# Altium PCB Port Solar Panel.PcbDoc (part 2 of 2)
Units mm, origin at the board's own origin, x right, y up, seen from the top; angles counter-clockwise.
Board outline 327.5 x 87 mm, 2 copper layers (Top Layer, Bottom Layer), stack 1.58 mm thick; 63 components, 41 nets, 237 pads, 1893 vias.
Unrouted connection lines stored in the file: 33.
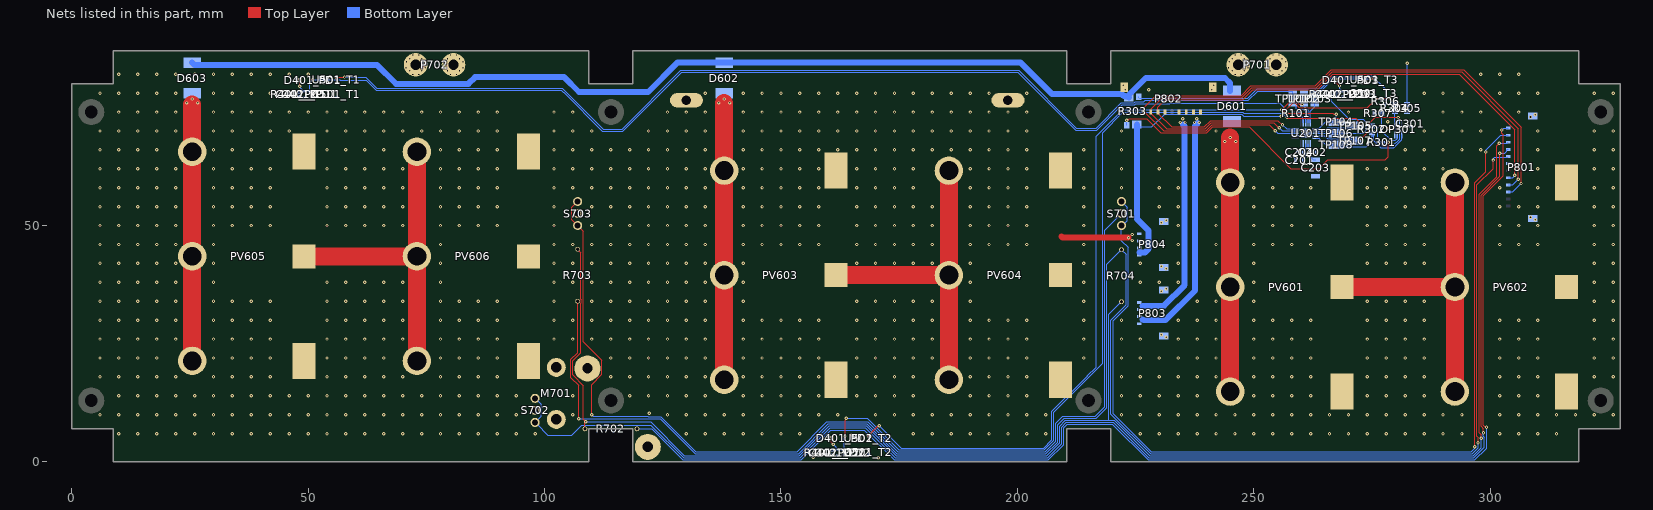
[diagram p2: the nets of this part, all layers, seen from the top]

## Via types
v1: diameter 0.711, hole 0.3, Top Layer to Bottom Layer, tented both sides, 1084 vias
v2: diameter 0.8, hole 0.5, Top Layer to Bottom Layer, 761 vias
v3: diameter 0.655, hole 0.25, Top Layer to Bottom Layer, 48 vias

## Nets (pads, with @x,y where several pads share a name; then routed paths per layer and width w, separated by ;. In a path a pad name is that pad's centre, name@x,y a point inside that pad or via, vN(x,y) a via of type N, cw(c..) or ccw(c..) an arc to the next point about the centre after c; other vN are vias at no path point) (continued)
GND: C201.1 C202.2 C203.2 C204.2 C301.1 C402_PD1.1 C402_PD2.1 C402_PD3.1 C501_T1.1 C501_T2.1 C501_T3.1 M701.1 OP301.4 P801.6 P801.M1 P801.M2 P802.6 P802.M1 P802.M2 P803.M1 P803.M2 P804.M1 P804.M2 pad.3 pad.5 R307.2 R401_PD1.1 R401_PD2.1 R401_PD3.1 S702.1 S703.1 U201.6 U201.9 U201.21 U501_T1.A1 U501_T2.A1 U501_T3.A1
  other v1: 170.6,0.905 156.8,0.962 164.9,5.8 10,6 14,6 18,6 22,6 26,6 30,6 34,6 38,6 42,6 46,6 50,6 54,6 58,6 62,6 66,6 70,6 74,6 78,6 82,6 86,6 90,6 94,6 98,6 130,6 134,6 138,6 142,6 146,6 150,6 154,6 178,6 182,6 186,6 190,6 194,6 198,6 202,6 206,6 226,6 230,6 234,6 238,6 242,6 246,6 250,6 254,6 258,6 262,6 266,6 270,6 274,6 278,6 282,6 286,6 290,6 294,6 302,6 306,6 310,6 314,6 6,10 10,10 14,10 18,10 22,10 26,10 30,10 34,10 38,10 42,10 46,10 50,10 54,10 58,10 62,10 66,10 70,10 74,10 78,10 82,10 86,10 90,10 94,10 106,10 126,10 130,10 134,10 138,10 142,10 146,10 150,10 154,10 158,10 162,10 170,10 174,10 178,10 182,10 186,10 190,10 194,10 198,10 202,10 206,10 222,10 226,10 230,10 234,10 238,10 242,10 246,10 250,10 254,10 258,10 262,10 266,10 270,10 274,10 278,10 282,10 286,10 290,10 294,10 302,10 306,10 310,10 314,10 318,10 322,10 326,10 122.152,10.281 10,14 14,14 18,14 22,14 26,14 30,14 34,14 38,14 42,14 46,14 50,14 54,14 58,14 62,14 66,14 70,14 74,14 78,14 82,14 86,14 90,14 94,14 106,14 118,14 122,14 126,14 130,14 134,14 142,14 146,14 150,14 154,14 158,14 166,14 170,14 174,14 178,14 190,14 194,14 198,14 202,14 222,14 226,14 230,14 234,14 238,14 250,14 254,14 258,14 262,14 274,14 278,14 282,14 286,14 302,14 306,14 310,14 6,18 10,18 14,18 18,18 22,18 30,18 34,18 38,18 42,18 54,18 58,18 62,18 66,18 70,18 78,18 82,18 86,18 90,18 114,18 118,18 122,18 126,18 130,18 134,18 142,18 146,18 150,18 154,18 158,18 166,18 170,18 174,18 178,18 190,18 194,18 198,18 202,18 222,18 226,18 230,18 234,18 238,18 242,18 250,18 254,18 258,18 262,18 274,18 278,18 282,18 286,18 302,18 306,18 310,18 322,18 326,18 6,22 10,22 14,22 18,22 30,22 34,22 38,22 42,22 54,22 58,22 62,22 66,22 78,22 82,22 86,22 90,22 114,22 118,22 122,22 126,22 130,22 134,22 142,22 146,22 150,22 154,22 158,22 166,22 170,22 174,22 178,22 182,22 190,22 194,22 198,22 202,22 214,22 222,22 226,22 230,22 234,22 238,22 242,22 250,22 254,22 258,22 262,22 274,22 278,22 282,22 286,22 302,22 306,22 310,22 322,22 326,22 6,26 10,26 14,26 18,26 22,26 30,26 34,26 38,26 42,26 54,26 58,26 62,26 66,26 70,26 78,26 82,26 86,26 90,26 102,26 106,26 110,26 114,26 118,26 122,26 126,26 130,26 134,26 142,26 146,26 150,26 154,26 158,26 166,26 170,26 174,26 178,26 182,26 190,26 194,26 198,26 202,26 214,26 222,26 226,26 234,26 238,26 242,26 250,26 254,26 258,26 262,26 274,26 278,26 282,26 286,26 302,26 306,26 310,26 322,26 326,26 6,30 10,30 14,30 18,30 22,30 30,30 34,30 38,30 42,30 54,30 58,30 62,30 66,30 70,30 78,30 82,30 86,30 90,30 102,30 106,30 110,30 114,30 118,30 122,30 126,30 130,30 134,30 142,30 146,30 150,30 154,30 158,30 166,30 170,30 174,30 178,30 182,30 190,30 194,30 198,30 202,30 214,30 222,30 234,30 238,30 242,30 250,30 254,30 258,30 262,30 274,30 278,30 282,30 286,30 302,30 306,30 310,30 322,30 326,30 6,34 10,34 14,34 18,34 22,34 30,34 34,34 38,34 42,34 54,34 58,34 62,34 66,34 70,34 78,34 82,34 86,34 90,34 102,34 110,34 114,34 118,34 122,34 126,34 130,34 134,34 142,34 166,34 170,34 174,34 178,34 182,34 190,34 214,34 238,34 242,34 250,34 274,34 278,34 282,34 286,34 322,34 326,34 6,38 10,38 14,38 18,38 22,38 30,38 54,38 58,38 62,38 66,38 70,38 78,38 102,38 106,38 110,38 114,38 118,38 122,38 126,38 130,38 134,38 142,38 190,38 214,38 226,38 230,38 234,38 250,38 322,38 326,38 6,42 10,42 14,42 18,42 22,42 30,42 78,42 102,42 106,42 110,42 114,42 118,42 122,42 126,42 130,42 134,42 142,42 166,42 170,42 174,42 178,42 182,42 190,42 214,42 226,42 234,42 242,42 250,42 274,42 278,42 282,42 286,42 322,42 326,42 6,46 10,46 14,46 18,46 22,46 30,46 78,46 102,46 106,46 110,46 114,46 118,46 122,46 126,46 130,46 134,46 142,46 146,46 150,46 154,46 158,46 166,46 170,46 174,46 178,46 182,46 190,46 194,46 198,46 202,46 214,46 230,46 234,46 242,46 250,46 254,46 258,46 262,46 274,46 278,46 282,46 286,46 302,46 306,46 310,46 322,46 326,46 6,50 10,50 14,50 18,50 22,50 30,50 34,50 38,50 42,50 54,50 58,50 62,50 66,50 70,50 78,50 82,50 86,50 90,50 102,50 110,50 114,50 118,50 122,50 126,50 130,50 134,50 142,50 146,50 150,50 154,50 158,50 166,50 170,50 174,50 178,50 182,50 190,50 194,50 198,50 202,50 214,50 234,50 242,50 250,50 254,50 258,50 262,50 274,50 278,50 282,50 286,50 302,50 306,50 310,50 322,50 326,50 6,54 10,54 14,54 18,54 22,54 30,54 34,54 38,54 42,54 54,54 58,54 62,54 66,54 70,54 78,54 82,54 86,54 90,54 102,54 110,54 114,54 118,54 122,54 126,54 130,54 134,54 142,54 146,54 150,54 154,54 158,54 166,54 170,54 174,54 178,54 182,54 190,54 194,54 198,54 202,54 214,54 230,54 234,54 242,54 250,54 254,54 258,54 262,54 274,54 278,54 282,54 286,54 302,54 306,54 310,54 322,54 326,54 6,58 10,58 14,58 18,58 22,58 30,58 34,58 38,58 42,58 54,58 58,58 62,58 66,58 70,58 78,58 82,58 86,58 90,58 102,58 106,58 110,58 114,58 118,58 122,58 126,58 130,58 134,58 142,58 146,58 150,58 154,58 158,58 166,58 170,58 174,58 178,58 190,58 194,58 198,58 202,58 214,58 222,58 230,58 234,58 250,58 254,58 258,58 262,58 274,58 278,58 282,58 286,58 302,58 310,58 322,58 326,58 6,62 10,62 14,62 18,62 22,62 30,62 34,62 38,62 42,62 54,62 58,62 62,62 66,62 70,62 78,62 82,62 86,62 90,62 102,62 106,62 110,62 114,62 118,62 122,62 126,62 130,62 134,62 142,62 146,62 150,62 154,62 158,62 166,62 170,62 174,62 178,62 190,62 194,62 198,62 202,62 214,62 222,62 230,62 234,62 242,62 250,62 254,62 274,62 278,62 282,62 286,62 290,62 310,62 322,62 326,62 6,66 10,66 14,66 18,66 30,66 34,66 38,66 42,66 54,66 58,66 62,66 66,66 78,66 82,66 86,66 90,66 102,66 106,66 110,66 114,66 118,66 122,66 126,66 130,66 134,66 142,66 146,66 150,66 154,66 158,66 162,66 166,66 170,66 174,66 178,66 182,66 186,66 190,66 194,66 198,66 202,66 214,66 222,66 230,66 234,66 242,66 250,66 282,66 286,66 290,66 294,66 298,66 310,66 322,66 326,66 260.4,68.95 261.5,68.95 6,70 10,70 14,70 18,70 22,70 30,70 34,70 38,70 42,70 46,70 54,70 58,70 62,70 66,70 70,70 74,70 78,70 82,70 86,70 90,70 102,70 106,70 110,70 122,70 126,70 130,70 134,70 142,70 146,70 150,70 154,70 158,70 162,70 166,70 170,70 174,70 178,70 182,70 186,70 190,70 194,70 198,70 202,70 222,70 242,70 286,70 290,70 294,70 298,70 310,70 322,70 326,70 260.4,70.05 261.5,70.05 278.327,70.435 278.338,71.95 10,74 14,74 18,74 22,74 30,74 34,74 38,74 42,74 46,74 50,74 54,74 58,74 62,74 66,74 70,74 74,74 78,74 82,74 86,74 90,74 102,74 106,74 126,74 130,74 134,74 142,74 146,74 150,74 154,74 158,74 162,74 166,74 170,74 174,74 178,74 182,74 186,74 190,74 194,74 198,74 202,74 270,74 274,74 290,74 294,74 298,74 306,74 6,78 10,78 14,78 18,78 22,78 30,78 34,78 38,78 42,78 46,78 134,78 142,78 146,78 150,78 154,78 158,78 162,78 166,78 170,78 174,78 178,78 182,78 186,78 190,78 194,78 202,78 286,78 290,78 294,78 302,78 306,78 310,78 322,78 326,78 227.775,78.686 10,82 14,82 18,82 22,82 26,82 30,82 34,82 38,82 42,82 46,82 50,82 298,82 302,82 306,82
NetC201_2: C201.2 U201.8 | length 3.6
  Bottom Layer w0.254: C201.2@260.5,63.85 260.5,64.05 260.95,64.5 U201.8@260.95,67.3
NetC202_1: C202.1 C203.1 U201.7 | length 4.3
  Bottom Layer w0.254: U201.7@261.45,67.3 261.45,66.05 261.9,65.6 C202.1@261.9,65.5 261.9,64.625 262.575,63.95 C203.1@263.05,63.95
NetD601_1: D601.1 PV601.1 | length 53.7
  Top Layer w3.81: PV601.1@245,14.889 PV601.1@245,59.111 v1(245,68.613)
  other v1: 243.837,67.774 246.15,67.774
NetD602_1: D602.1 PV603.1 | length 58.5
  Top Layer w3.81: PV603.1@138,17.389 PV603.1@138,61.611 138,75.924
  other v1: 136.837,75.924 139.15,75.924 138,76.763
NetD603_1: D603.1 PV605.1 | length 54.2
  Top Layer w3.81: PV605.1@25.5,21.389 PV605.1@25.5,43.5 PV605.1@25.5,65.611 25.5,75.6
  other v1: 24.337,75.924 26.65,75.924 25.5,76.763
NetOP301_2: OP301.2 R301.2 R302.1 | length 10.7
  Bottom Layer w0.254: R302.1@274.973,71.075 275.073,70.975 275.83,70.975 276.155,70.65 276.155,68.095 276.503,67.747 276.503,67.723 276.626,67.6 R301.2@276.65,67.6 276.674,67.6 276.797,67.477 276.797,67.249 277.196,66.85 279.387,66.85 280.798,68.261 280.798,69.153 OP301.2@280.8,69.155
NetOP301_3: OP301.3 R306.2 R307.1 | length 11.2
  Bottom Layer w0.254: R306.2@277.9,75.873 277.9,75.323 277.184,74.607 277.184,73.848 R307.1@277.087,73.75 277.087,69.988 279.075,68 279.926,68 280.3,68.374 OP301.3@280.3,69.155
NetOP301_5: OP301.5 R304.2 R305.2 | length 2.5
  Bottom Layer w0.254: OP301.5@279.8,71.645 R304.2@279.8,74.1
NetPV601_2: PV601.2 PV602.1 | length 68.1
  Top Layer w3.81: PV601.2@268.622,37 PV602.1@292.5,37 ; PV602.1@292.5,14.889 PV602.1@292.5,37 ; PV602.1@292.5,59.111 PV602.1@292.5,37
NetPV603_2: PV603.2 PV604.1 | length 68.1
  Top Layer w3.81: PV603.2@161.622,39.5 PV604.1@185.5,39.5 ; PV604.1@185.5,17.389 PV604.1@185.5,39.5 ; PV604.1@185.5,61.611 PV604.1@185.5,39.5
NetPV605_2: PV605.2 PV606.1 | length 68.1
  Top Layer w3.81: PV605.2@49.122,43.5 PV606.1@73,43.5 ; PV606.1@73,21.389 PV606.1@73,43.5 ; PV606.1@73,65.611 PV606.1@73,43.5
NetR101_1: R101.1 U201.17 | length 2.2
  Bottom Layer w0.254: R101.1@259.667,73.6 259.667,73.475 259.94,73.202 260.45,72.692 U201.17@260.45,71.7
NetR301_1: R301.1 R303.3 | length 67
  Top Layer w0.203: v1(223.1,72.25) 223.3,72.25 223.6,72.55 227.35,72.55 230.275,69.625 240.071,69.625 241.341,70.895 249.005,70.895 257.85,62.05 263.8,62.05 265.65,63.9 277.75,63.9 278.4,64.55 v1(278.4,67.6)
  Bottom Layer w0.203: v1(223.1,72.25) 223.1,71.231 R303.3@223.13,71.201 ; R301.1@277.402,67.6 v1(278.4,67.6)
NetR303_4: R303.4 R306.1 | length 57.8
  Bottom Layer w0.254: R303.4@225.67,77.199 225.67,77.074 225.844,76.9 248.675,76.9 250.738,78.963 264.102,78.963 266.621,81.482 274.032,81.482 274.26,81.71 274.973,81.71 277.9,78.783 R306.1@277.9,76.625
NetS701_1: S701.1 S703.2 S703.3 | length 214.7
  Top Layer w0.254: S703.2@107,55.08 105.743,53.823 105.743,51.257 S703.3@107,50 108.237,48.763 108.237,25.463 112.144,21.556 112.144,18.535 109.95,16.341 v1(109.95,10)
  Bottom Layer w0.254: v1(109.95,10) 110.027,10 110.327,9.7 121.838,9.7 121.946,9.592 124.626,9.592 132.018,2.2 153.4,2.2 159.7,8.5 168.361,8.5 174.702,2.159 205.841,2.159 208.087,4.406 208.087,8.222 209.548,9.683 216.483,9.683 218.45,11.65 218.45,48.99 S701.1@222,52.54
NetU201_12: U201.12
PortKnifeReturn: P801.5 R703.1 R704.1 | length 371.2
  Top Layer w0.254: R703.1@107,34 107,23.109 105.568,21.678 105.568,17.865 107.201,16.233 107.201,9.199 v1(107.25,9.15) ; v1(297.4,4.1) 297.4,5.25 297.182,5.468 297.182,58.582 300.65,62.05 v1(300.65,63.85)
  Bottom Layer w0.254: v1(107.25,9.15) 107.26,9.16 124.447,9.16 131.839,1.768 153.736,1.768 160.036,8.068 168.182,8.068 174.523,1.727 206.02,1.727 208.519,4.227 208.519,7.917 209.854,9.251 216.662,9.251 218.9,11.489 218.9,41.8 R704.1@222,44.9 222.968,43.932 222.968,33.2 219.768,30 219.768,10.114 228.155,1.727 296.161,1.727 297.4,2.966 v1(297.4,4.1) ; v1(300.65,63.85) 300.65,64.15 300.985,64.485 303.685,64.485 P801.5@303.8,64.6
SPI_CLK: P801.8 P802.7 U201.15 | length 127.2
  Top Layer w0.254: v1(256.05,71.35) 255.95,71.35 255.1,72.2 240.85,72.2 239.545,70.895 232.605,70.895 229.7,73.8 P802.7@229.7,74 229.7,74.994 231.305,76.598 247.64,76.598 248.071,77.03 248.08,77.03 249.736,78.686 263.389,78.686 266.658,81.955 274.251,81.955 274.27,81.974 293.476,81.974 305.2,70.25 v1(305.2,60.6)
  Bottom Layer w0.254: v1(256.05,71.35) 256.9,70.5 U201.15@258.75,70.5 ; P801.8@303.8,60.1 304.7,60.1 v1(305.2,60.6)
SPI_MISO: P801.9 P802.8 U201.14 | length 133.2
  Top Layer w0.254: v1(255.335,70.65) 255.293,70.65 254.204,71.739 241,71.739 239.724,70.463 231.537,70.463 228.2,73.8 P802.8@228.2,74 228.327,74.127 228.327,74.703 230.654,77.03 247.461,77.03 249.549,79.118 263.21,79.118 266.582,82.49 293.91,82.49 305.9,70.5 v1(305.9,59.8)
  Bottom Layer w0.254: v1(255.335,70.65) 255.985,70 U201.14@258.75,70 ; P801.9@303.8,58.6 304.7,58.6 v1(305.9,59.8)
SPI_MOSI: P801.10 P802.9 U201.13 | length 139.4
  Top Layer w0.254: v1(254.5,70.05) 253.242,71.308 241.179,71.308 239.903,70.032 230.918,70.032 226.95,74 P802.9@226.7,74 226.7,74.876 229.286,77.462 247.282,77.462 249.37,79.55 263.032,79.55 266.403,82.922 294.43,82.922 306.56,70.791 306.56,58.96 v1(306.5,58.9)
  Bottom Layer w0.254: v1(254.5,70.05) 255.05,69.5 U201.13@258.75,69.5 ; P801.10@303.8,57.1 304.7,57.1 v1(306.5,58.9)
SwitchDeployable_P: P801.2 S701.2 S701.3 | length 198.1
  Top Layer w0.254: v1(296.7,3.2) 296.705,3.205 296.705,4.297 296.74,4.332 296.74,4.374 296.75,4.384 296.75,59.1 299.05,61.4 v1(299.05,65.55)
  Bottom Layer w0.254: S701.2@222,55.08 223.257,53.823 223.257,51.007 222.25,50 S701.3@222,50 222,46.819 223.4,45.419 223.4,33.021 220.25,29.871 220.25,10.243 228.334,2.159 295.959,2.159 296.7,2.9 v1(296.7,3.2) ; v1(299.05,65.55) 299.05,65.95 302.2,69.1 P801.2@303.8,69.1
SwitchUHF_P: P801.4 S702.2 S702.3 | length 292.5
  Top Layer w0.254: v1(298.55,6.2) 298.55,7.066 298.045,7.571 298.045,56.438 302,60.393 v1(302,65.3)
  Bottom Layer w0.254: S702.2@98,8.05 98.325,8.05 100.675,5.7 105.742,5.7 107.847,7.805 122.509,7.805 129.409,0.905 154.094,0.905 160.389,7.2 167.829,7.2 174.165,0.864 206.377,0.864 209.383,3.869 209.383,7.393 210.377,8.388 220.273,8.388 227.797,0.864 296.519,0.864 298.76,3.105 298.76,5.274 298.55,5.484 v1(298.55,6.2) ; S702.2@98,8.375 99.268,9.643 99.268,12.232 98.045,13.455 S702.3@98,13.455 ; v1(302,65.3) 303,65.3 303.427,65.727 303.427,65.927 303.6,66.1 P801.4@303.8,66.1 P801.4@303.805,66.105
UHFKnifeReturn_P: P801.1 R702.1 | length 268.2
  Top Layer w0.254: v1(299.2,7.35) 299.113,7.437 298.863,7.437 298.477,7.823 298.477,56.259 302.737,60.519 302.737,69.223 302.427,69.533 302.427,70.027 302.6,70.2 v1(302.45,70.2)
  Bottom Layer w0.254: R702.1@119.55,7 122.664,7 129.191,0.473 154.273,0.473 160.5,6.7 167.65,6.7 173.918,0.432 206.556,0.432 209.815,3.69 209.815,7.215 210.556,7.956 220.094,7.956 227.618,0.432 296.698,0.432 299.21,2.944 299.21,6.474 299.2,6.484 v1(299.2,7.35) ; v1(302.45,70.2) 302.818,70.568 303.768,70.568 P801.1@303.8,70.6
V+: D601.2 D602.2 D603.2 R303.1 | length 232.6
  Bottom Layer w1.27: D603.2@25.5,84.45 25.95,84 64.55,84 68.6,79.95 83.9,79.95 85.35,81.4 104.15,81.4 107.3,78.25 121.9,78.25 128.1,84.45 D602.2@138,84.45 200.7,84.45 207.35,77.8 222.093,77.8 222.361,77.532 222.451,77.532 222.738,77.245 223.375,77.245 R303.1@223.565,77.055 ; R303.1@223.482,77.532 227.15,81.2 243.9,81.2 245,80.1 D601.2@245,78.5
V-: P701.1 P702.1 P804.1 P804.2 PV602.2 PV604.2 PV606.2 R305.1 | length 23.1
  Top Layer w1.27: 209.3,47.7 209.55,47.45 v1(223.5,47.45)
  Bottom Layer w0.254: R305.1@282.4,75.6 282.5,75.7 282.45,75.75 v1(282.45,84.3)
  other v1: 224.3,46.85 224.3,48.1
  other v3: 72.115,81.968 73.385,81.968 80.115,81.968 81.385,81.968 246.065,81.968 247.335,81.968 254.065,81.968 255.335,81.968 71.48,82.73 74.02,82.73 79.48,82.73 82.02,82.73 245.43,82.73 247.97,82.73 253.43,82.73 255.97,82.73 70.718,83.365 74.782,83.365 78.718,83.365 82.782,83.365 244.668,83.365 248.732,83.365 252.668,83.365 256.732,83.365 70.845,84.635 74.782,84.635 78.845,84.635 82.782,84.635 244.795,84.635 248.732,84.635 252.795,84.635 256.732,84.635 71.48,85.27 74.02,85.27 79.48,85.27 82.02,85.27 245.43,85.27 247.97,85.27 253.43,85.27 255.97,85.27 72.115,86.032 73.385,86.032 80.115,86.032 81.385,86.032 246.065,86.032 247.335,86.032 254.065,86.032 255.335,86.032
V_out: P804.3 P804.4 R303.2 R304.1 | length 89
  Top Layer w0.254: v1(255.75,73.1) 256.34,73.69 256.34,74.024 258.288,75.972 258.603,75.972 259.632,74.944 273.944,74.944 275.95,76.95 v1(278.75,76.95)
  Bottom Layer w0.254: R303.2@225.235,71.345 225.68,70.9 228.45,70.9 231.105,73.555 247.425,73.555 247.88,73.1 v1(255.75,73.1) ; v1(278.75,76.95) 278.837,76.863 278.837,76.438 279.675,75.6 R304.1@279.8,75.6
  Bottom Layer w1.27: R303.2@225.235,71.345 225.235,51.415 227.75,48.9 227.75,45.1 227,44.35 225.85,44.35
VIN0: TP101.1 U201.18 U501_T1.B1 | length 229.4
  Top Layer w0.203: U501_T1.B1@55.8,81 U501_T1.B1@55.8,81 55.801,81.145 56.056,81.4 v1(57.7,81.4)
  Bottom Layer w0.203: v1(57.7,81.4) 62.225,81.4 64.565,79.06 64.625,79 103.716,79 103.8,79 112.4,70.4 116.4,70.4 128.838,82.838 200.237,82.838 212.475,70.6 216.645,70.6 221.996,75.951 224.686,75.951 224.873,76.138 226.713,76.138 227.025,76.45 248.8,76.45 250.794,78.444 258.206,78.444 258.25,78.4 TP101.1@258.25,76.65
  Bottom Layer w0.254: TP101.1@258.25,76.65 259.012,75.888 259.012,74.738 259.119,74.631 260.469,74.631 260.95,74.15 U201.18@260.95,71.7
VIN1: TP102.1 U201.19 U501_T2.B1 | length 163.1
  Top Layer w0.203: U501_T2.B1@168.3,5.25 U501_T2.B1@168.3,5.25 168.301,5.395 170.459,7.553 170.653,7.553 v1(170.75,7.65) ; v1(255.85,74.5) 256.9,75.55 257.729,76.379 258.802,76.379 259.577,75.604 v1(260.225,75.604)
  Bottom Layer w0.203: v1(170.75,7.65) 175.454,2.946 205.515,2.946 207.3,4.732 207.3,10.744 214.825,18.269 ; 214.8,18.2 216.645,20.045 216.645,68.84 222.283,74.477 255.827,74.477 v1(255.85,74.5)
  Bottom Layer w0.254: TP102.1@260.6,76.65 260.6,75.2 261.45,74.35 U201.19@261.45,71.7
VIN2: TP103.1 U201.20 U501_T3.B1 | length 19.9
  Top Layer w0.203: v1(274.699,81.05) 275.25,81.05 U501_T3.B1@275.3,81
  Bottom Layer w0.254: U201.20@261.95,71.7 261.95,74.148 262.9,75.098 262.9,76.65 262.9,77.15 266.8,81.05 v1(274.699,81.05)
VIN3: C401_PD1.1 C402_PD1.2 D401_PD1.1 R401_PD1.2 TP104.1 U201.1 | length 249.4
  Top Layer w0.254: D401_PD1.1@48,80.75 48.212,80.538 v1(48.212,79.45) ; v1(257,73.75) 266.7,73.75 266.9,73.55 v1(267.4,73.55)
  Bottom Layer w0.254: R401_PD1.2@48.05,78.126 48.162,78.238 49.088,78.238 C402_PD1.2@49.2,78.35 ; v1(48.212,79.45) 48.3,79.363 48.3,79.15 49.1,78.35 C402_PD1.2@49.2,78.35 ; v1(257,73.75) 257,74.284 255.424,75.86 232.326,75.86 232.198,75.732 225.042,75.732 224.854,75.544 222.164,75.544 216.814,70.194 212.306,70.194 200.068,82.432 129.007,82.432 116.568,69.994 112.232,69.994 104.044,78.181 103.96,78.181 103.548,78.594 64.456,78.594 62.31,80.74 56.783,80.74 56.652,80.87 v1(51.001,80.87) 50.35,80.219 C401_PD1.1@50.35,78.35 C402_PD1.2@49.2,78.35 ; U201.1@263.15,70.5 263.771,70.5 265.171,71.9 TP104.1@267.45,71.9 267.4,71.95 v1(267.4,73.55)
VIN4: C401_PD2.1 C402_PD2.2 D401_PD2.1 R401_PD2.2 TP105.1 U201.2 | length 195.1
  Top Layer w0.203: v1(163.55,5.45) 163.55,8.863 163.8,9.113 v1(163.8,9.25) ; v1(257,72.85) 257.135,72.715 271.585,72.715 v1(272.7,71.6)
  Top Layer w0.254: D401_PD2.1@160.5,5 160.583,4.917 160.583,4.217 v1(161.05,3.75)
  Bottom Layer w0.203: C401_PD2.1@163.1,2.6 163.2,2.6 163.358,2.758 163.358,5.121 163.55,5.313 v1(163.55,5.45) ; v1(163.8,9.25) 168.2,9.25 174.885,2.565 205.673,2.565 207.681,4.574 207.681,10.538 207.741,10.597 218,20.857 218,69.656 222.305,73.961 247.596,73.961 247.807,73.75 256.1,73.75 v1(257,72.85) ; U201.2@263.15,70 264.951,70 265.62,70.668 271.382,70.668 TP105.1@271.4,70.65
  Bottom Layer w0.254: R401_PD2.2@160.8,2.376 160.912,2.488 161.738,2.488 161.85,2.6 161.692,2.758 161.692,3.108 v1(161.05,3.75) ; C402_PD2.2@161.95,2.6 C401_PD2.1@163.1,2.6
VIN5: C401_PD3.1 C402_PD3.2 D401_PD3.1 R401_PD3.2 TP106.1 U201.3 | length 29.9
  Top Layer w0.254: D401_PD3.1@267.5,80.75 267.633,80.617 267.633,80.017 v1(268.1,79.55)
  Bottom Layer w0.254: U201.3@263.15,69.5 TP106.1@267.45,69.5 273.1,69.5 273.8,70.2 273.8,71.835 273.135,72.5 270.149,72.5 266.4,76.249 266.4,77.5 267.076,78.176 R401_PD3.2@267.6,78.176 267.712,78.288 268.638,78.288 C402_PD3.2@268.75,78.4 ; v1(268.1,79.55) 268.187,79.463 268.187,78.963 268.517,78.633 268.517,78.533 268.65,78.4 C402_PD3.2@268.75,78.4 ; C401_PD3.1@269.9,78.4 C402_PD3.2@268.75,78.4
VIN6: OP301.6 OP301.7 TP107.1 U201.4 | length 19.1
  Top Layer w0.254: v1(272.7,68.35) 274.3,69.95 274.3,71.5 275.65,72.85 v1(280.55,72.85)
  Bottom Layer w0.254: U201.4@263.15,69 264.915,69 265.609,68.306 271.344,68.306 TP107.1@271.35,68.3
VIN7: OP301.1 R302.2 TP108.1 U201.5 | length 24.3
  Bottom Layer w0.254: U201.5@263.15,68.5 263.771,68.5 265.171,67.1 TP108.1@267.45,67.1 267.844,66.706 273.788,66.706 274.35,67.268 274.35,68.225 275.3,69.175 275.3,67.924 276.806,66.418 279.566,66.418 281.298,68.151 281.298,69.153 OP301.1@281.3,69.155 ; R302.2@275.3,69.5 R302.2@275.3,69.725
VKnife: P801.3 R702.2 R703.2 R704.2 | length 341.4
  Top Layer w0.254: R703.2@107,45 107,44.892 107.692,44.199 107.692,34.446 107.805,34.333 107.805,33.667 107.692,33.554 107.692,23.053 106,21.36 106,18.4 108.237,16.163 108.237,9.013 108.638,8.611 v1(108.75,8.5) ; R702.2@108.55,7 108.55,8.417 v1@108.633,8.5 ; v1(298.1,5) 298.1,5.716 297.614,6.202 297.614,56.617 301.36,60.364 301.36,64.674 301.34,64.694 301.34,66.89 v1(301.85,67.4)
  Bottom Layer w0.254: v1(108.75,8.5) 122.425,8.5 129.588,1.336 153.915,1.336 160.215,7.636 167.797,7.636 167.802,7.632 168.008,7.632 174.344,1.295 206.199,1.295 208.951,4.048 208.951,7.611 210.159,8.82 219.332,8.82 ; R704.2@222,33.9 219.332,31.232 219.332,8.82 ; v1(298.1,5) 298.1,3.055 296.34,1.295 227.976,1.295 220.452,8.82 219.332,8.82 ; v1(301.85,67.4) 303.278,67.4 303.305,67.427 303.627,67.427 P801.3@303.8,67.6
VPortD+: P802.1 P802.2 P803.3 P803.4 | length 49.3
  Bottom Layer w1.27: 226.5,30.15 226.65,30 231.3,30 237.55,36.25 237.55,71.1 238.1,71.65
  other v1: 237.45,71.8 238.45,71.8 237.95,72.6
VPortD-: P802.3 P802.4 P803.1 P803.2 | length 44.8
  Bottom Layer w1.27: 226.5,32.95 226.55,33 230.95,33 235.35,37.4 235.35,71 235,71.35
  other v1: 234.4,71.8 235.45,71.8 234.95,72.6
pads on no net: OP301.9
copper on no net:
  other v2: 232,4 236,4 240,4 244,4 248,4 252,4 256,4 260,4 264,4 280,4 284,4 288,4 292,4 300,4 304,4 308,4 128,8 132,8 136,8 140,8 144,8 148,8 152,8 228,8 232,8 236,8 240,8 244,8 248,8 252,8 256,8 260,8 264,8 276,8 280,8 284,8 288,8 292,8 296,8 304,8 308,8 312,8 12,12 16,12 20,12 24,12 28,12 32,12 36,12 40,12 44,12 60,12 64,12 68,12 72,12 76,12 80,12 84,12 88,12 92,12 124,12 128,12 132,12 136,12 140,12 144,12 148,12 152,12 156,12 172,12 176,12 180,12 184,12 188,12 192,12 196,12 200,12 204,12 228,12 232,12 236,12 240,12 248,12 252,12 256,12 260,12 264,12 272,12 276,12 280,12 284,12 288,12 296,12 300,12 304,12 308,12 312,12 8,16 12,16 16,16 20,16 24,16 28,16 32,16 36,16 40,16 44,16 56,16 60,16 64,16 68,16 72,16 76,16 80,16 84,16 88,16 92,16 120,16 124,16 128,16 132,16 144,16 148,16 152,16 156,16 168,16 172,16 176,16 180,16 192,16 196,16 200,16 204,16 228,16 232,16 236,16 240,16 252,16 256,16 260,16 264,16 272,16 276,16 280,16 284,16 288,16 300,16 304,16 308,16 312,16 8,20 12,20 16,20 20,20 32,20 36,20 40,20 44,20 56,20 60,20 64,20 68,20 80,20 84,20 88,20 92,20 120,20 124,20 128,20 132,20 144,20 148,20 152,20 156,20 168,20 172,20 176,20 180,20 192,20 196,20 200,20 204,20 228,20 232,20 236,20 240,20 248,20 252,20 256,20 260,20 264,20 272,20 276,20 280,20 284,20 288,20 296,20 300,20 304,20 308,20 312,20 8,24 12,24 16,24 20,24 32,24 36,24 40,24 44,24 56,24 60,24 64,24 68,24 76,24 80,24 84,24 88,24 92,24 120,24 124,24 128,24 132,24 144,24 148,24 152,24 156,24 168,24 172,24 176,24 180,24 192,24 196,24 200,24 204,24 228,24 232,24 236,24 240,24 248,24 252,24 256,24 260,24 264,24 272,24 276,24 280,24 284,24 288,24 296,24 300,24 304,24 308,24 312,24 8,28 12,28 16,28 20,28 32,28 36,28 40,28 44,28 56,28 60,28 64,28 68,28 76,28 80,28 84,28 88,28 92,28 120,28 124,28 128,28 132,28 144,28 148,28 152,28 156,28 168,28 172,28 176,28 180,28 192,28 196,28 200,28 204,28 228,28 236,28 240,28 248,28 252,28 256,28 260,28 264,28 272,28 276,28 280,28 284,28 288,28 296,28 300,28 304,28 308,28 312,28 8,32 12,32 16,32 20,32 32,32 36,32 40,32 44,32 56,32 60,32 64,32 68,32 76,32 80,32 84,32 88,32 92,32 120,32 124,32 128,32 132,32 144,32 148,32 152,32 156,32 168,32 172,32 176,32 180,32 192,32 196,32 200,32 204,32 240,32 248,32 252,32 272,32 276,32 280,32 284,32 288,32 296,32 8,36 12,36 16,36 20,36 32,36 36,36 40,36 44,36 56,36 60,36 64,36 68,36 76,36 80,36 84,36 88,36 92,36 120,36 124,36 128,36 132,36 144,36 168,36 172,36 176,36 180,36 192,36 228,36 240,36 252,36 8,40 12,40 16,40 20,40 32,40 56,40 60,40 64,40 68,40 76,40 80,40 120,40 124,40 128,40 132,40 144,40 192,40 228,40 240,40 248,40 252,40 272,40 276,40 280,40 284,40 288,40 296,40 8,44 12,44 16,44 20,44 32,44 80,44 120,44 124,44 128,44 132,44 144,44 168,44 172,44 176,44 180,44 192,44 232,44 240,44 248,44 252,44 256,44 260,44 264,44 272,44 276,44 280,44 284,44 288,44 296,44 300,44 304,44 308,44 312,44 8,48 12,48 16,48 20,48 32,48 56,48 60,48 64,48 68,48 76,48 80,48 120,48 124,48 128,48 132,48 144,48 148,48 152,48 156,48 168,48 172,48 176,48 180,48 192,48 196,48 200,48 204,48 232,48 240,48 248,48 252,48 256,48 260,48 264,48 272,48 276,48 280,48 284,48 288,48 296,48 300,48 304,48 308,48 312,48 8,52 12,52 16,52 20,52 32,52 36,52 40,52 44,52 56,52 60,52 64,52 68,52 76,52 80,52 84,52 88,52 92,52 120,52 124,52 128,52 132,52 144,52 148,52 152,52 156,52 168,52 172,52 176,52 180,52 192,52 196,52 200,52 204,52 228,52 240,52 248,52 252,52 256,52 260,52 264,52 272,52 276,52 280,52 284,52 288,52 296,52 300,52 304,52 312,52 8,56 12,56 16,56 20,56 32,56 36,56 40,56 44,56 56,56 60,56 64,56 68,56 76,56 80,56 84,56 88,56 92,56 120,56 124,56 128,56 132,56 144,56 148,56 152,56 156,56 168,56 172,56 176,56 180,56 192,56 196,56 200,56 204,56 228,56 232,56 240,56 248,56 252,56 256,56 260,56 264,56 272,56 276,56 280,56 284,56 288,56 296,56 300,56 312,56 8,60 12,60 16,60 20,60 32,60 36,60 40,60 44,60 56,60 60,60 64,60 68,60 76,60 80,60 84,60 88,60 92,60 120,60 124,60 128,60 132,60 144,60 148,60 152,60 156,60 168,60 172,60 176,60 180,60 192,60 196,60 200,60 204,60 228,60 232,60 240,60 252,60 256,60 260,60 272,60 276,60 280,60 284,60 288,60 300,60 8,64 12,64 16,64 20,64 32,64 36,64 40,64 44,64 56,64 60,64 64,64 68,64 80,64 84,64 88,64 92,64 120,64 124,64 128,64 132,64 144,64 148,64 152,64 156,64 168,64 172,64 176,64 180,64 192,64 196,64 200,64 204,64 228,64 232,64 240,64 248,64 252,64 280,64 284,64 288,64 292,64 296,64 255.168,67.215 8,68 12,68 16,68 20,68 32,68 36,68 40,68 44,68 56,68 60,68 64,68 68,68 76,68 80,68 84,68 88,68 92,68 120,68 124,68 128,68 132,68 144,68 148,68 152,68 156,68 168,68 172,68 176,68 180,68 184,68 188,68 192,68 196,68 200,68 204,68 232,68 240,68 248,68 284,68 288,68 292,68 296,68 300,68 312,68 252.795,69.362 8,72 12,72 16,72 20,72 32,72 36,72 40,72 44,72 56,72 60,72 64,72 68,72 72,72 76,72 80,72 84,72 88,72 92,72 124,72 128,72 132,72 144,72 148,72 152,72 156,72 172,72 176,72 180,72 184,72 188,72 192,72 196,72 200,72 204,72 12,76 16,76 20,76 32,76 36,76 40,76 44,76 60,76 64,76 68,76 72,76 76,76 80,76 84,76 88,76 92,76

## Polygon pours and split planes (outlines as drawn)
GND on Top Layer "Top Layer-GND 1" (solid, remove dead copper, pour order 4): 0,0 0,90.5 327.5,90.5 327.5,0
V- on Top Layer "Top Layer-GND" (solid, remove dead copper, pour order 2): 261.275,80.275 226.475,80.275 223.384,77.184 219.7,73.5 206.65,73.5 206.65,77.35 201,83 128.4,83 118.9,73.5 109.9,73.5 102.897,80.503 101.25,80.503 99.197,78.45 94.15,78.45 92.099,80.501 87.8,80.5 65.8,80.5 63.3,83 62.9,83 5.25,83 5.25,92.55 326.1,92.55 326.1,81.75 318.7,81.75 318.7,77.05 313.65,77.05 313.65,77.85 307.9,83.6 264.6,83.6
GND on Bottom Layer "Bottom Layer-GND" (solid, remove dead copper, pour order 6): 0,0 0,90.5 327.5,90.5 327.5,0

## Keep-outs
Keep-Out Layer:
  lines w0.254: 0,7.009 0,80 8.8,80 8.8,87 109.4,87 109.4,80 118.7,80 118.7,87 210.4,87 210.4,80 219.7,80 219.7,87 318.7,87 318.7,80 327.5,80 327.5,7 318.7,7 318.7,0 219.7,0 219.7,7 210.4,7 210.4,0 118.7,0 118.7,7 109.4,7 109.4,0 8.8,0 8.8,7.009 0,7.009 ; 33.75,38 33.75,49 45.95,49 45.95,38 33.75,38 ; 81.25,38 93.45,38 93.45,49 81.25,49 81.25,38 ; 146.25,34 146.25,45 158.45,45 158.45,34 146.25,34 ; 193.75,34 205.95,34 205.95,45 193.75,45 193.75,34 ; 253.25,31.5 253.25,42.5 265.45,42.5 265.45,31.5 253.25,31.5 ; 300.75,31.5 312.95,31.5 312.95,42.5 300.75,42.5 300.75,31.5

## Other copper
Top Layer:
  region net VPortD+: 239.1,71.2 239.1,74.6 236.8,74.6 236.8,71.2
  region net VPortD-: 236.1,71.2 236.1,74.6 233.8,74.6 233.8,71.2
  region net V-: 224.9,48.6 222.45,48.6 222.45,46.3 224.9,46.3
  region net V-: 318.65,77.8 313.6,77.8 313.6,10.95 318.65,10.95
  region net V-: 211.65,78.424 206.6,78.424 206.6,13.45 211.65,13.45
  region net V-: 99.15,82.2 94.1,82.2 94.1,17.45 99.15,17.45
  region net NetPV601_2: 271.15,63.05 266.1,63.05 266.1,10.95 271.15,10.95
  region net NetPV603_2: 164.15,63.05 159.1,63.05 159.1,10.95 164.15,10.95
  region net NetPV605_2: 51.65,69.55 46.6,69.55 46.6,17.45 51.65,17.45
Bottom Layer:
  rectangle net VIN6: 280.15,70.95 280.95,73.25
  rectangle net VPortD+: 225.2,28.85 227.75,31.15
  rectangle net VPortD-: 225.2,31.85 227.75,34.15
  region net VPortD-: 233.8,73.15 233.8,70.6 236.1,70.6 236.1,73.15
  region net VPortD+: 236.8,73.15 236.8,70.6 239.1,70.6 239.1,73.15
  rectangle net V-: 222.95,46.3 226.35,48.6
  rectangle net V_out: 225.15,43.3 227.05,45.6
  rectangle net NetD601_1: 243,66.85 247.299,73.25
  rectangle net NetD602_1: 135.9,75 140,79.1
  rectangle net NetD603_1: 23.4,75 27.5,79.1
  rectangle net NetOP301_5: 279.3,73.6 282.95,74.6

## Silkscreen, mask and mechanical layers (free items; w line width, h text height)
Top Overlay:
  drawing of 4351 lines, arcs and shapes, not listed
  text "ZENITH" at 159.2,84.9 h2
  text "HYPERION: PORT" at 284.375,83.088 h3
  text "SPI_MOSI" at 226.591,81.3 h0.7 r270.39
  text "SPI_MISO" at 228.061,81.3 h0.7 r270
  text "SPI_CLK" at 229.531,81.3 h0.7 r270
  text "3V3" at 232.471,81.3 h0.7 r270
  text "VPortD-" at 233.941,81.3 h0.7 r270
  text "VPortD-" at 235.411,81.3 h0.7 r270
  text "VPortD+" at 236.881,81.3 h0.7 r270
  text "VPortD+" at 238.351,81.3 h0.7 r270
  text "ADC_SPI_ / nCS_SD" at 223.75,81.2 h0.7 r270
  text "GND" at 231.001,81.2 h0.7 r270
  text "'.Print_Date'  V1.04 SVN 2699" at 284.202,81.076 h2
  text "Nicholas J. Sorensen, Erik F. Halliwell" at 284.35,78.85 h2
  text "RAM" at 1.9,42.3 h2 r90
  text "ANTIRAM" at 326.7,38.8 h2 r90
  text "NADIR" at 159.6,0.905 h2
Bottom Overlay:
  text "ZENITH" at 168.9,84.9 h2
  text "Test Points: / TP101-VIN0 / TP102-VIN1 / TP103-VIN2 / TP104-VIN3 / TP105-VIN4 / TP106-VIN5 / TP107-VIN6 / TP108-VIN7" at 292.2,74.6 h0.7
  text "UHFKnifeReturn_P" at 322.1,70.2 h0.7
  text "SwitchDeployable_P" at 324,68.73 h0.7
  text "VKnife" at 316.5,67.26 h0.7
  text "SwitchUHF_P" at 318.9,65.79 h0.7
  text "PortKnifeReturn" at 321.5,64.32 h0.7
  text "GND" at 313.4,62.85 h0.7
  text "3V3" at 313.4,61.38 h0.7
  text "SPI_CLK" at 316.1,59.91 h0.7
  text "SPI_MISO" at 316.65,58.44 h0.7
  text "SPI_MOSI" at 316.65,56.97 h0.7
  text "ADC_SPI_nCS_PD" at 322.2,55.5 h0.7
  text "ADC_SPI_nCS_P" at 319.7,54.03 h0.7
  text "ANTIRAM" at 326.7,50.7 h2 r90
  text "RAM" at 1.9,49.9 h2 r90
  text "VPort-" at 237.2,47.8 h0.7
  text "VPort-" at 237.2,46.37 h0.7
  text "VPort+" at 237.2,44.9 h0.7
  text "VPort+" at 237.2,43.43 h0.7
  text "VPortD-" at 237.6,33.3 h0.7
  text "VPortD-" at 237.6,31.87 h0.7
  text "VPortD+" at 237.6,30.4 h0.7
  text "VPortD+" at 237.6,28.93 h0.7
  text "NADIR" at 176.7,0.962 h2
Mechanical 1:
  lines w0.254: 0,7.009 8.8,7.009 8.8,0 109.4,0 109.4,7 118.7,7 118.7,0 210.4,0 210.4,7 219.7,7 219.7,0 318.7,0 318.7,7 327.5,7 327.5,80 318.7,80 318.7,87 219.7,87 219.7,80 210.4,80 210.4,87 118.7,87 118.7,80 109.4,80 109.4,87 8.8,87 8.8,80 0,80 0,7.009 ; 33.75,38 45.95,38 45.95,49 33.75,49 33.75,38 ; 81.25,38 81.25,49 93.45,49 93.45,38 81.25,38 ; 146.25,34 158.45,34 158.45,45 146.25,45 146.25,34 ; 193.75,34 193.75,45 205.95,45 205.95,34 193.75,34 ; 253.25,31.5 265.45,31.5 265.45,42.5 253.25,42.5 253.25,31.5 ; 300.75,31.5 300.75,42.5 312.95,42.5 312.95,31.5 300.75,31.5

## Text inside footprints (layer, text, board x,y; h text height)
PV601: Top Overlay "-" at 269,54.145 h0.7 r270; Top Overlay "-" at 269,33.444 h0.7 r270; Top Overlay "-" at 269.028,19.906 h0.7 r270; Top Overlay "+" at 244.365,54.78 h0.7 r270; Top Overlay "+" at 244.365,32.555 h0.7 r270; Top Overlay "+" at 244.365,10.33 h0.7 r270
PV602: Top Overlay "+" at 291.865,10.33 h0.7 r270; Top Overlay "+" at 291.865,32.555 h0.7 r270; Top Overlay "+" at 291.865,54.78 h0.7 r270; Top Overlay "-" at 316.528,19.906 h0.7 r270; Top Overlay "-" at 316.5,33.444 h0.7 r270; Top Overlay "-" at 316.5,54.145 h0.7 r270
PV603: Top Overlay "-" at 162,56.645 h0.7 r270; Top Overlay "-" at 162,35.944 h0.7 r270; Top Overlay "-" at 162.028,22.406 h0.7 r270; Top Overlay "+" at 137.365,57.28 h0.7 r270; Top Overlay "+" at 137.365,35.055 h0.7 r270; Top Overlay "+" at 137.365,12.83 h0.7 r270
PV604: Top Overlay "+" at 184.865,12.83 h0.7 r270; Top Overlay "+" at 184.865,35.055 h0.7 r270; Top Overlay "+" at 184.865,57.28 h0.7 r270; Top Overlay "-" at 209.528,22.406 h0.7 r270; Top Overlay "-" at 209.5,35.944 h0.7 r270; Top Overlay "-" at 209.5,56.645 h0.7 r270
PV605: Top Overlay "-" at 49.5,60.645 h0.7 r270; Top Overlay "-" at 49.5,39.944 h0.7 r270; Top Overlay "-" at 49.528,26.406 h0.7 r270; Top Overlay "+" at 24.865,61.28 h0.7 r270; Top Overlay "+" at 24.865,39.055 h0.7 r270; Top Overlay "+" at 24.865,16.83 h0.7 r270
PV606: Top Overlay "+" at 72.365,16.83 h0.7 r270; Top Overlay "+" at 72.365,39.055 h0.7 r270; Top Overlay "+" at 72.365,61.28 h0.7 r270; Top Overlay "-" at 97.028,26.406 h0.7 r270; Top Overlay "-" at 97,39.944 h0.7 r270; Top Overlay "-" at 97,60.645 h0.7 r270